# Altium PCB CAN v1.PcbDoc
Units mil, origin at the board's own origin, x right, y up, seen from the top; angles counter-clockwise.
Board outline not stored, 2 copper layers (Top Layer, Bottom Layer); 15 components, 0 nets, 46 pads, 11 vias.
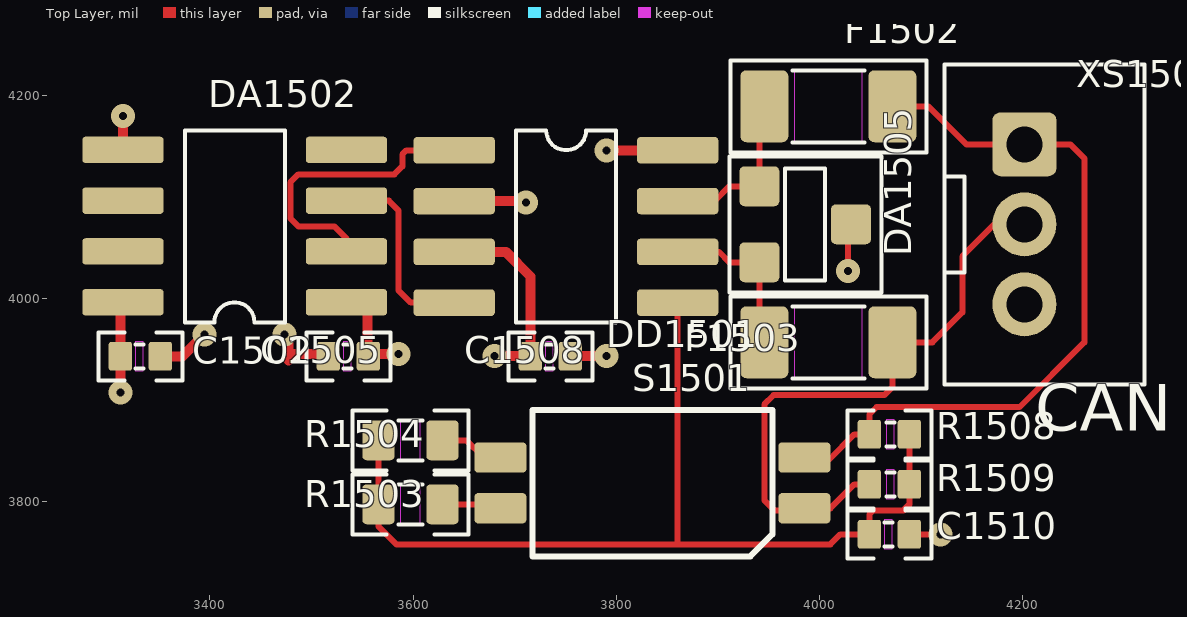
[diagram p0: Top Layer view]
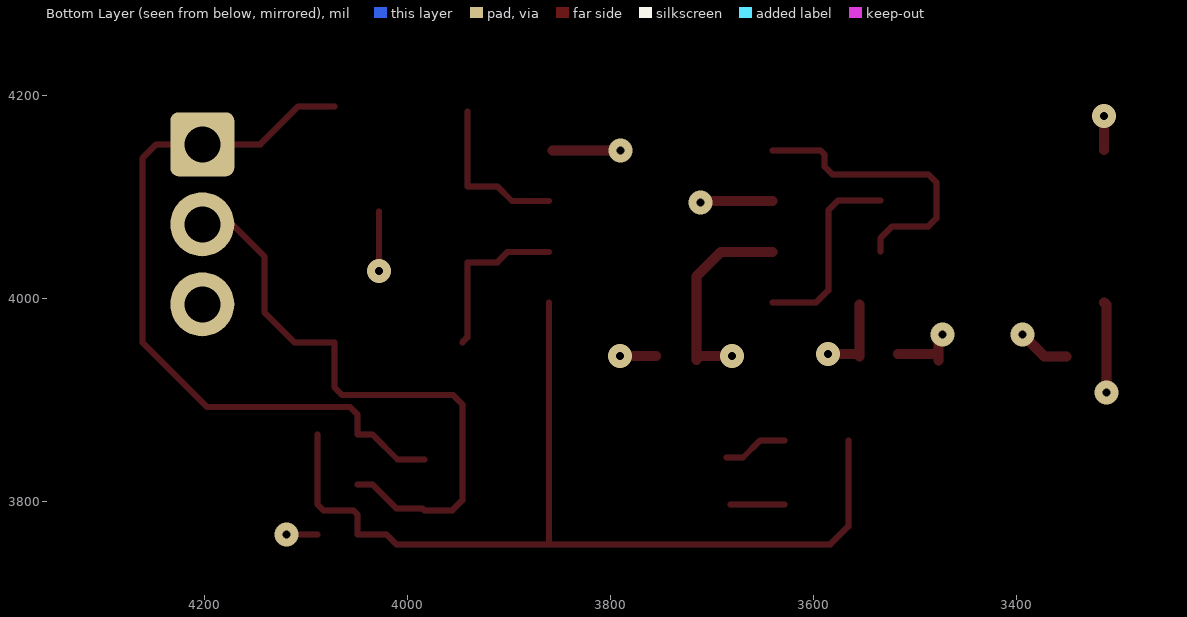
[diagram p1: Bottom Layer view, seen from below]

## Layer stack, top to bottom
Top Solder: solder mask 0.4, Solder Resist, Dk 3.5
Top Layer: signal copper 1.4
Dielectric 1: dielectric 12.6, FR-4, Dk 4.8
Bottom Layer: signal copper 1.4
Bottom Solder: solder mask 0.4, Solder Resist, Dk 3.5

## Components (designator, comment, footprint, x,y, rotation, side; value= is the part's Value field where it differs from the comment)
C1502 "0,1" CAP0402 3312.01,3942.91 r0 top
C1505 "0,1" CAP0402 3516.73,3942.91 r0 top
C1508 "0,1" CAP0402 3715.55,3942.91 r0 top
C1510 "4700" CAP0402 4049.21,3767.72 r0 top
DA1502 "ISO7421" SO8 3534.45,3996.06 r180 top
DA1505 "PESD1CAN" SOT-23 3940.94,4110.23 r0 top
DD1501 "TJA1040" SO8 3640.51,4145.67 r0 top
F1502 "0,12A" MF-NSMF 3945.87,4188.98 r0 top
F1503 "0,12A" MF-NSMF 3945.87,3956.69 r0 top
R1503 "62" RES0603 3628.94,3797.24 r180 top
R1504 "62" RES0603 3565.94,3860.24 r0 top
R1508 "1,3K" RES0402 4088.58,3866.14 r180 top
R1509 "1,3K" RES0402 4088.58,3816.93 r180 top
S1501 "GDH-02S" GDH02S 3985.24,3793.31 r180 top
XS1502 "CAN" MW-3M 4201.77,4151.57 r270 top

## Footprints (in the part's own frame and the unit in brackets; to place one, negate y for a bottom-side part, rotate by r counter-clockwise, add the part's x,y. Pads: shape width x height; smd on the part's side, far side on the other; paste and mask are expansions set on the pad)
CAP0402 [mm]
  rrect25% 0.59x0.72 smd: 1(0,0) 2(1,0)
  Top Layer keep-out region: 0.375,0.36 0.375,-0.36 0.575,-0.36 0.575,0.36
  silkscreen extent -0.55,-0.6 1.55,0.6, body extent 0,-0.25 1,0.25, height 0.49
GDH02S [mm] "DIP-switch"
  rrect25% 1.3x0.76 smd: 1(0,0) 2(0,-1.27) 3(7.6,-1.27) 4(7.6,0)
  silkscreen extent 0.8,-2.46 6.8,1.2, body extent -0.27,-2.44 7.87,1.23, height 2.35
MF-NSMF [mm]
  rrect25% 1.2x1.8 smd: 1(0,0) 2(3.2,0)
  Top Layer keep-out region: 0.75,-0.9 2.45,-0.9 2.45,0.9 0.75,0.9
  silkscreen extent -0.85,-1.15 4.05,1.15, body extent 0,-0.82 3.2,0.78, height 0.7
MW-3M [mm]
  rrect25% 1.6x1.6 hole 0.9: 1(0,0)
  round 1.6 hole 0.9: 2(2,0) 3(4,0)
  silkscreen extent -2,-2 6,3, body extent -2,-2 6,3, height 6
RES0402 [mm]
  rrect25% 0.59x0.72 smd: 1(0,0) 2(1,0)
  Top Layer keep-out region: 0.375,0.36 0.375,-0.36 0.575,-0.36 0.575,0.36
  silkscreen extent -0.55,-0.6 1.55,0.6, body extent 0,-0.25 1,0.25, height 0.33
RES0603 [mm]
  rrect25% 0.8x1 smd: 1(0,0) 2(1.6,0)
  Top Layer keep-out region: 0.55,0.5 0.55,-0.5 1.05,-0.5 1.05,0.5
  silkscreen extent -0.65,-0.75 2.25,0.75, body extent 0.03,-0.42 1.58,0.43, height 0.51
SO8 [mil]
  rrect25% 80x26 smd: 1(0,0) 2(0,-50) 3(0,-100) 4(0,-150) 5(220,-150) 6(220,-100) 7(220,-50) 8(220,0)
  silkscreen extent 61,-169 159,20, body extent -8,-173 229,24, height 69
SOT-23 [mm]
  rrect25% 1x1 smd: 1(0,0) 2(0,-1.9) 3(2.29,-0.95)
  silkscreen extent -0.75,-2.65 3.05,0.75, body extent -0.15,-2.41 2.4,0.51, height 0.97

## Part data
C1502 C1505 C1508 C1510: library part CAP_0402, "Конденсатор чип"
DA1502: "Цифровой изолятор 1 вх 1 вых"
DA1505: "ESD-CAN защита"
DD1501: "Драйвер CAN"
F1502 F1503: library part MF-NSMF, "Предохранитель самовосстанавливающийся"
R1503 R1504: library part RES_0603, "Резистор чип"
R1508 R1509: library part RES_0402, "Резистор чип"
S1501: library part GDH02S, "DIP-переключатель"
XS1502: library part Разъем3_1, "Разъем"

## Via types
v1: diameter 23.62, hole 7.87, Top Layer to Bottom Layer, tented both sides, 11 vias

## Nets (pads, with @x,y where several pads share a name; then routed paths per layer and width w, separated by ;. In a path a pad name is that pad's centre, name@x,y a point inside that pad or via, vN(x,y) a via of type N, cw(c..) or ccw(c..) an arc to the next point about the centre after c; other vN are vias at no path point)
pads on no net: C1502.1 C1502.2 C1505.1 C1505.2 C1508.1 C1508.2 C1510.1 C1510.2 DA1502.1 DA1502.2 DA1502.3 DA1502.4 DA1502.5 DA1502.6 DA1502.7 DA1502.8 DA1505.1 DA1505.2 DA1505.3 DD1501.1 DD1501.2 DD1501.3 DD1501.4 DD1501.5 DD1501.6 DD1501.7 DD1501.8 F1502.1 F1502.2 F1503.1 F1503.2 R1503.1 R1503.2 R1504.1 R1504.2 R1508.1 R1508.2 R1509.1 R1509.2 S1501.1 S1501.2 S1501.3 S1501.4 XS1502.1 XS1502.2 XS1502.3
copper on no net: | length 3997.5
  Top Layer w5.91: 3534.45,4046.06 3534.45,4059.06 3522.64,4070.87 3487.2,4070.87 3479.33,4078.74 3479.33,4114.17 3487.2,4122.05 3581.69,4122.05 3589.57,4129.92 3589.57,4141.73 3593.5,4145.67 3640.51,4145.67 ; 3534.45,4096.06 3576.18,4096.06 3585.63,4086.61 3585.63,4007.87 3597.84,3995.67 3640.51,3995.67 ; 3565.94,3860.24 3565.94,3797.24 3565.94,3775.59 3583.66,3757.87 3754.92,3757.87 3859.25,3757.87 ; 3628.94,3797.24 3682.09,3797.24 ; 3628.94,3860.24 3652.56,3860.24 3669.49,3843.31 3686.02,3843.31 ; 3860.51,3995.67 3860.51,3759.14 3859.25,3757.87 ; 3860.51,4045.67 3901.18,4045.67 3911.42,4035.43 3940.94,4035.43 3940.94,3961.62 3945.87,3956.69 ; 3860.51,4095.67 3896.85,4095.67 3911.41,4110.23 3916.34,4110.23 3940.94,4110.23 3940.94,4184.05 ; 3983.27,3841.34 4009.65,3841.34 4034.45,3866.14 4049.21,3866.14 4049.21,3885.83 4056.19,3892.8 4196.94,3892.8 4260.83,3956.69 4260.83,4137.8 4247.05,4151.57 4144.69,4151.57 4107.28,4188.98 4071.85,4188.98 ; v1(4028,4026.76) 4028,4085.2 ; 4049.21,3816.93 4034.45,3816.93 4010.83,3793.31 3985.24,3793.31 3983.27,3791.34 3955.71,3791.34 3945.87,3801.18 3945.87,3895.67 3954.81,3904.61 4063.98,3904.61 4071.85,3912.49 4071.85,3956.69 4111.22,3956.69 4140.75,3986.22 4140.75,4041.34 4172.24,4072.83 4211.61,4072.83 ; 4088.58,3767.72 v1(4119.09,3767.72) ; 4088.58,3866.14 4088.58,3816.93 4088.58,3797.24 4082.68,3791.34 4053.15,3791.34 4049.21,3787.4 4049.21,3767.72 4020.67,3767.72 4010.83,3757.87 3859.25,3757.87
  Top Layer w9.84: v1(3312.01,3907.48) 3312.01,3993.62 3314.45,3996.06 ; 3314.45,4146.06 v1(3314.45,4179.61) ; 3351.38,3942.91 3373.03,3942.91 v1(3394.69,3964.57) ; 3477.36,3938.98 v1@3477.36,3960.63 ; 3477.37,3944.89 3516.74,3944.89 ; 3555.12,3942.91 3555.12,3994.09 ; 3556.11,3944.89 v1(3585.64,3944.89) ; 3640.51,4045.67 3691.3,4045.67 3715.55,4021.42 3715.55,3939.21 ; 3640.51,4095.67 3710.2,4095.67 v1(3711.38,4094.49) ; v1(3680.13,3942.92) 3713.36,3942.92 ; 3754.93,3942.92 v1(3790.37,3942.92) ; v1(3790.35,4145.67) 3857.23,4145.67
  other v1: 3473.43,3964.57